# EAGLE board hbridge[1] (EAGLE 7.5.0)
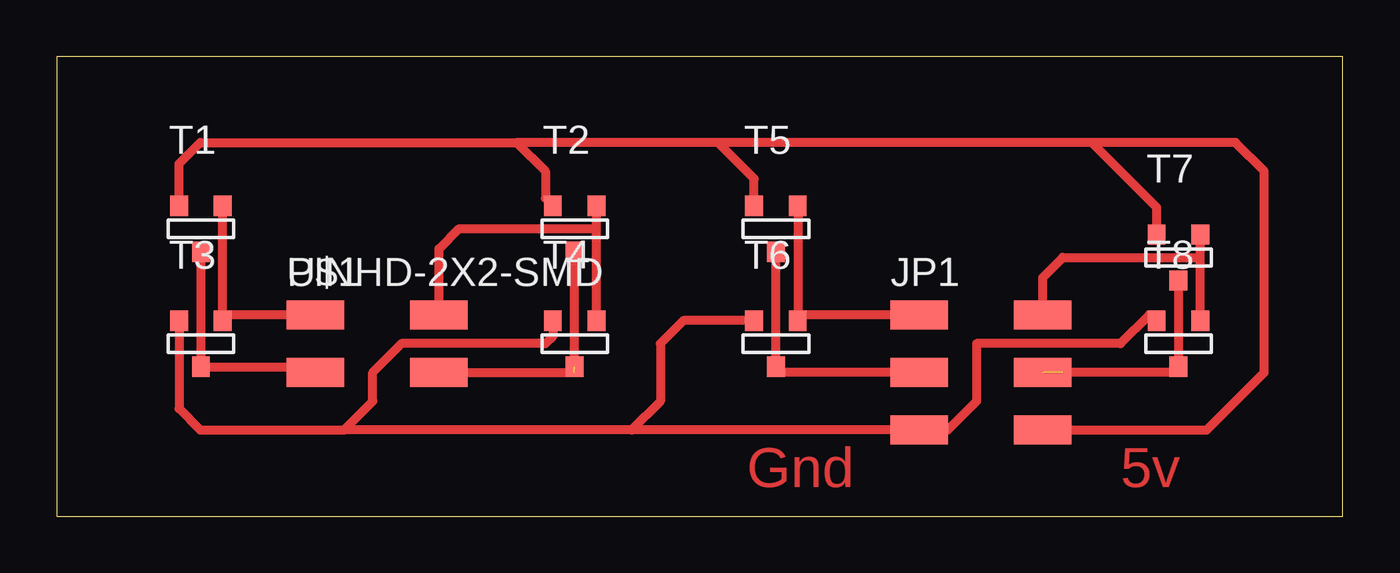
[diagram p0: board, top side]

Size 56.82 x 20.31 mm. Coordinates in mm from the lower left corner, seen from the top.
Outline: 0,0 56.82,0 56.82,20.31 0,20.31 0,0
Copper layers (1*16): Top 0.035mm / dielectric 1.5mm / Bottom 0.035mm
Design rules "default": minimum track width 10mil, minimum drill 24mil, track to track 8mil, track to pad 8mil, pad to pad 8mil, via to via 8mil, smd to smd 8mil, copper to edge 40mil, drill to drill 8mil, minimum pad ring 10mil, minimum via ring 8mil, stop-mask expansion 4mil, vias tented up to drill 0mil, thermal gap 10mil

## Footprints (pad centres in the part's own frame; a part is rotated, then mirrored left to right if it is on the bottom)
2X03SMD = smd 2.54 x 1.27: 1 -2.54,2.54; 2 2.92,2.54; 3 -2.54,0; 4 2.92,0; 5 -2.54,-2.54; 6 2.92,-2.54
SOT-23 = smd 0.787 x 0.889: 1 0.025,-1.016; 2 -0.94,1.016; 3 0.991,1.016
2X02SMD = smd 2.54 x 1.27: 1 -2.54,1.27; 2 2.92,1.27; 3 -2.54,-1.27; 4 2.92,-1.27

## Placement (x,y rotation side)
JP1  [2X03SMD]  40.64,6.35 0 top
T1  [SOT-23]  6.35,12.7 0 top
T2  [SOT-23]  22.86,12.7 0 top
T3  [SOT-23]  6.35,7.62 0 top
T4  [SOT-23]  22.86,7.62 0 top
T5  [SOT-23]  31.75,12.7 0 top
T6  [SOT-23]  31.75,7.62 0 top
T7  [SOT-23]  49.53,11.43 0 top
T8  [SOT-23]  49.53,7.62 0 top
U$1  PINHD-2X2-SMD  [2X02SMD]  13.97,7.62 0 top

## Library data of the parts
JP1 T1-T8 U$1 = fab

## Nets
GND: JP1.5 T3.2 T4.2 T6.2 T8.2
N$1: T1.1 T3.1 U$1.3
N$2: T2.1 T4.1 U$1.4
N$3: T2.3 T4.3 U$1.2
N$4: T1.3 T3.3 U$1.1
N$5: JP1.3 T5.1 T6.1
N$6: JP1.4 T7.1 T8.1
N$7: JP1.2 T7.3 T8.3
N$8: JP1.1 T5.3 T6.3
VCC: JP1.6 T1.2 T2.2 T5.2 T7.2

## Tracks (layer width: path | path; a pad name or v marks a point on that pad's centre or on a via)
GND
  Top 0.406: 12.7,3.81 6.35,3.81 5.41,4.75 T3.2 | 12.7,3.81 13.97,5.08 13.97,6.35 15.24,7.62 21.59,7.62 21.92,7.95 T4.2 | T6.2 27.69,8.64 26.67,7.62 26.67,5.08 25.4,3.81 | 25.4,3.81 JP1.5 39.37,3.81 40.64,5.08 40.64,7.62 46.99,7.62 48.26,8.89 48.34,8.89 T8.2 | 25.4,3.81 12.7,3.81
N$1
  Top 0.406: T1.1 T3.1 11.18,6.6 U$1.3
N$2  (1 unrouted)
  Top 0.406: T4.1 T2.1 | U$1.4 22.86,6.35
N$3
  Top 0.406: T4.3 23.85,12.7 | 23.85,12.7 T2.3 | U$1.2 16.89,11.81 17.78,12.7 23.85,12.7
N$4
  Top 0.406: U$1.1 7.59,8.89 T3.3 T1.3
N$5
  Top 0.406: 32.03,11.43 T5.1 31.75,11.66 31.75,11.43 31.77,11.4 T6.1 32.03,6.35 JP1.3
N$6  (1 unrouted)
  Top 0.406: T7.1 T8.1 49.55,6.38 49.53,6.35 44.45,6.35
N$7
  Top 0.406: T8.3 50.52,11.43 | 50.52,11.43 T7.3 | JP1.2 43.56,10.54 44.45,11.43 50.52,11.43
N$8
  Top 0.406: T5.3 T6.3 32.99,8.89 JP1.1
VCC
  Top 0.406: T1.2 5.41,15.57 6.35,16.51 20.32,16.51 | 20.32,16.51 21.59,15.24 21.59,14.05 T2.2 | T5.2 30.81,14.91 29.21,16.51 | 29.21,16.51 20.32,16.51 | JP1.6 50.8,3.81 53.34,6.35 53.34,15.24 52.07,16.51 45.72,16.51 | 45.72,16.51 29.21,16.51 | T7.2 48.59,13.64 45.72,16.51

## Text on the board
Top: Gnd | 5v